# Altium PCB EasyRideOS_Altium_PCB.PcbDoc
Units mm, origin at the board's own origin, x right, y up, seen from the top; angles counter-clockwise.
Board outline 33 x 38 mm, 2 copper layers (Top Layer, Bottom Layer), stack 1.691 mm thick; 64 components, 34 nets, 158 pads, 75 vias.
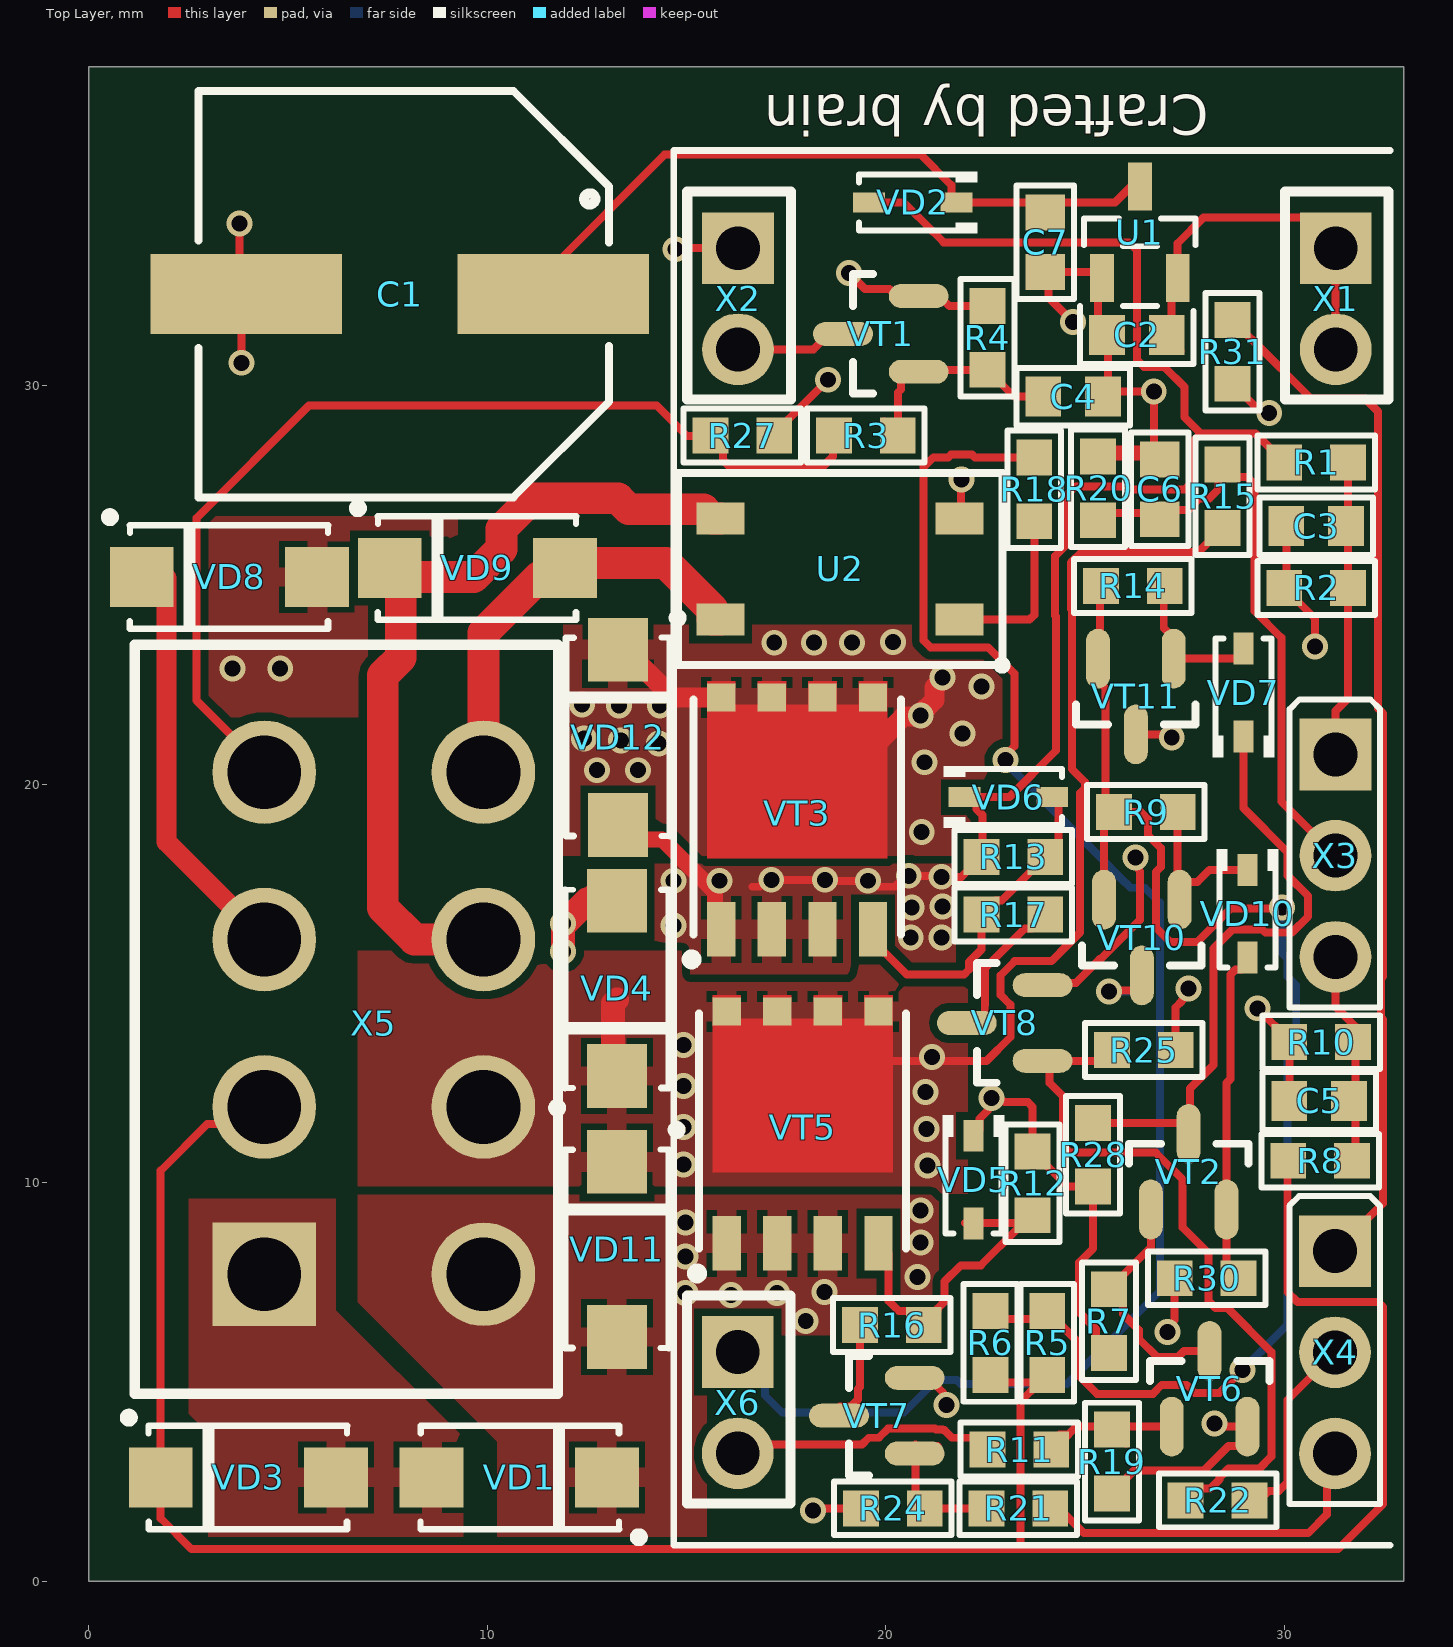
[diagram p0: Top Layer view]
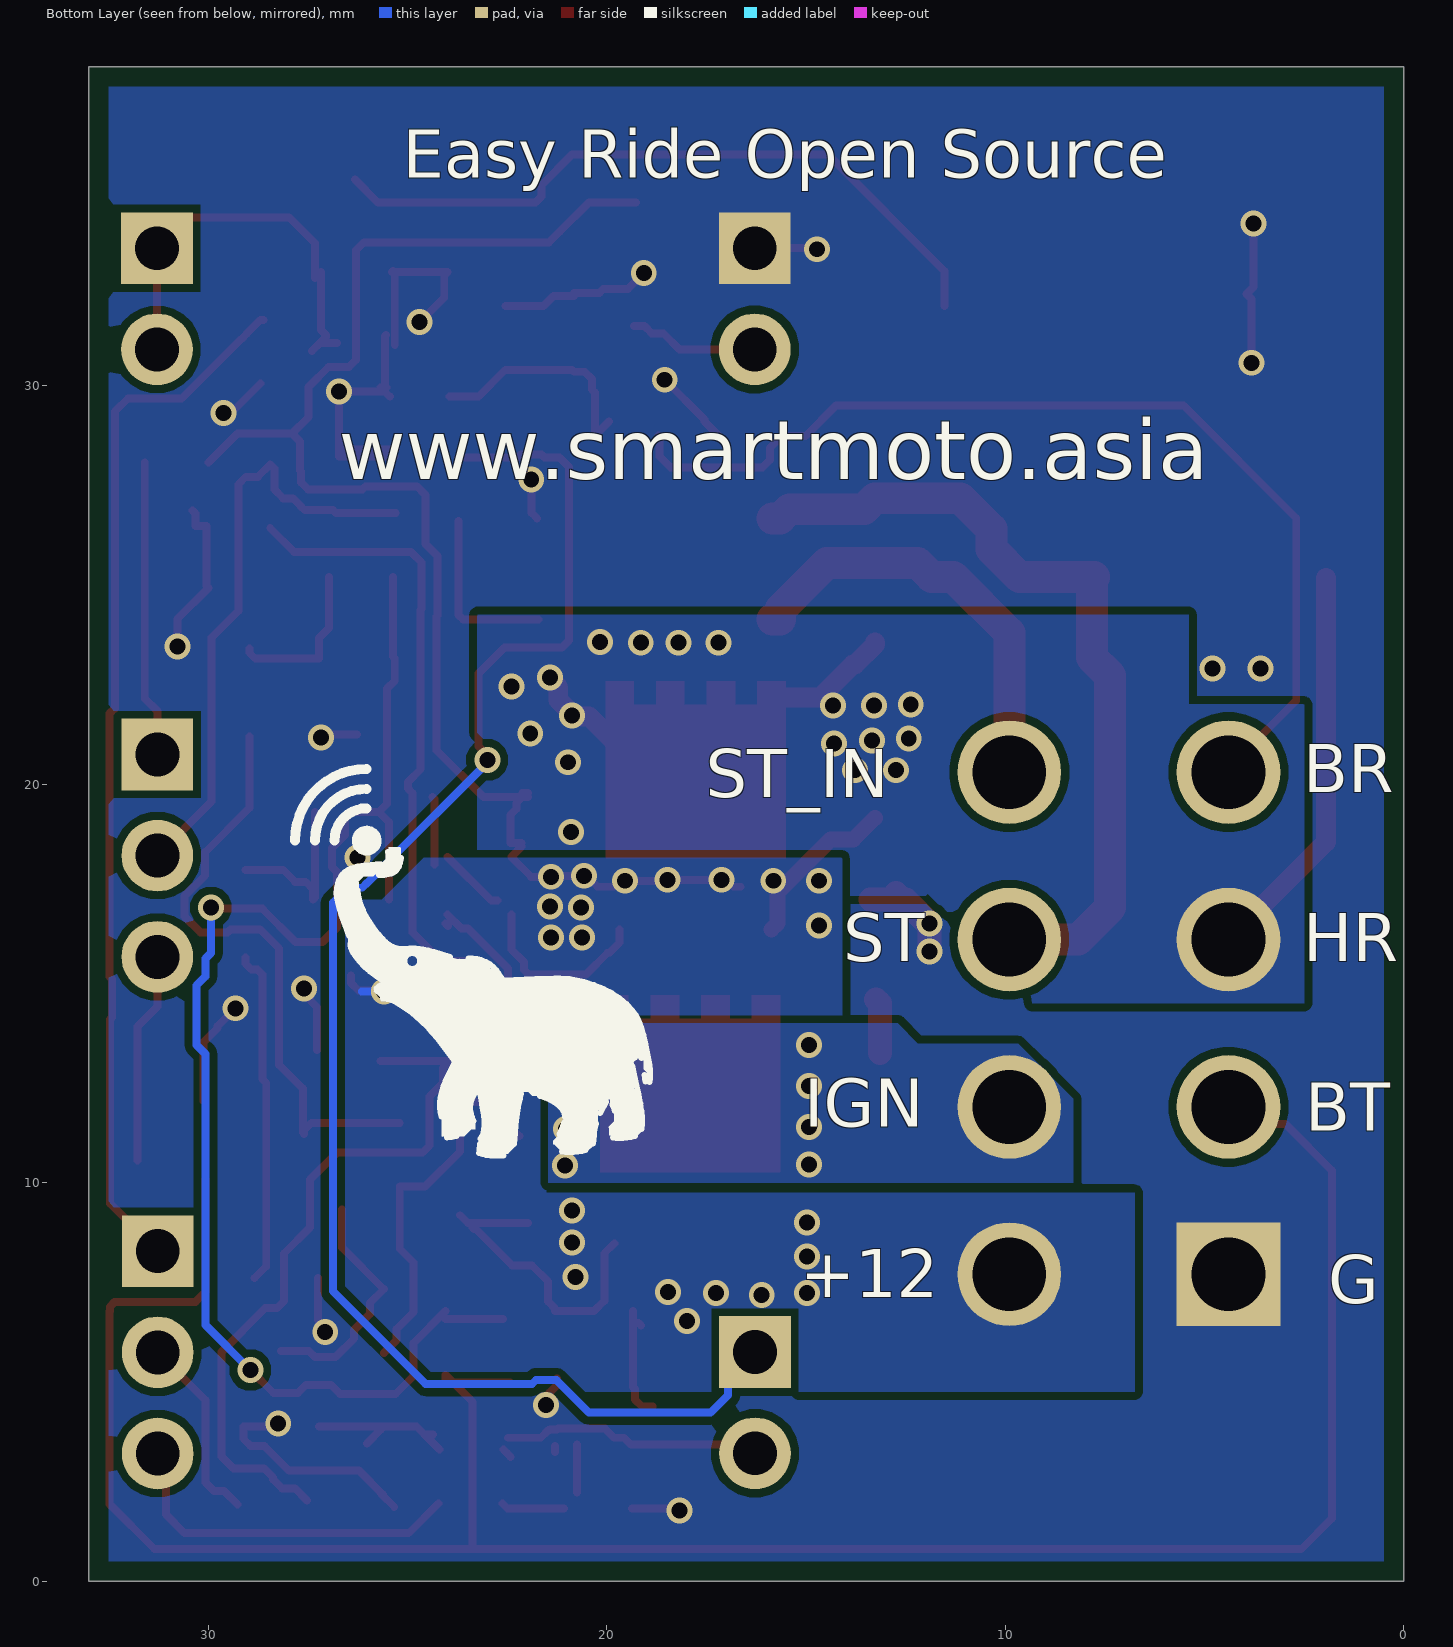
[diagram p1: Bottom Layer view, seen from below]
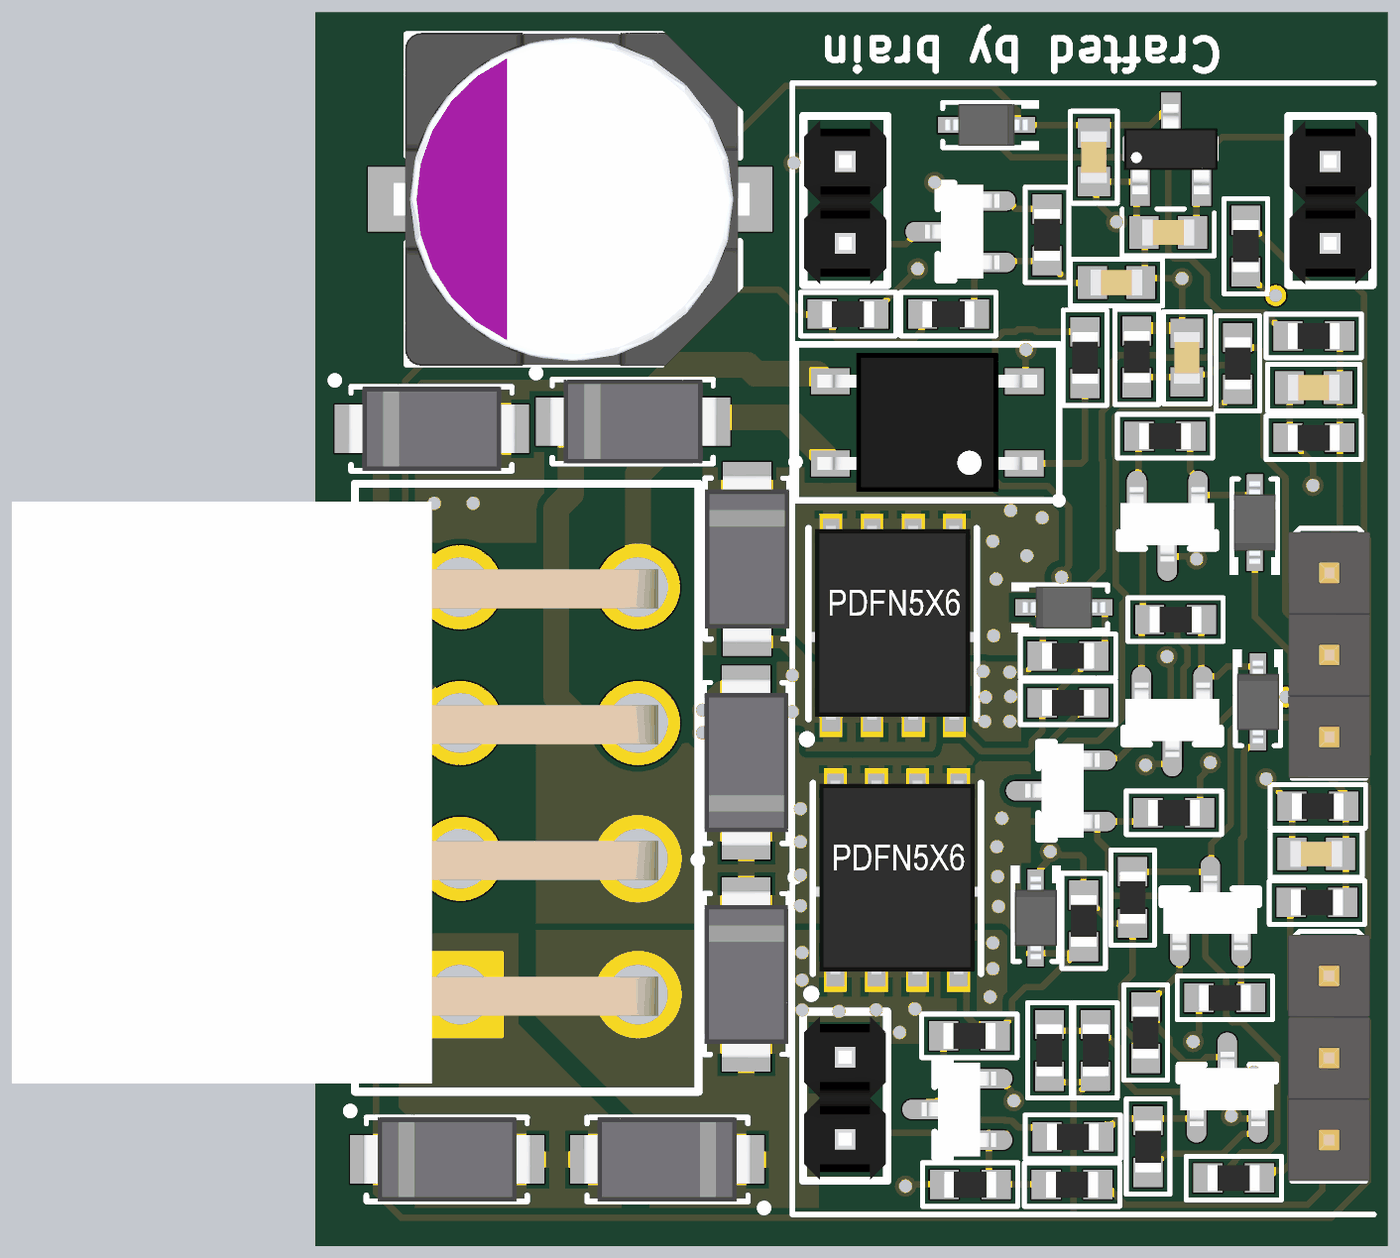
[diagram p2: 3D render of the assembled board from above, using the file's embedded part models]

## Layer stack, top to bottom
Top Solder: solder mask 0.0102, Solder Resist, Dk 3.5
Top Layer: signal copper 0.0356
Dielectric 1: dielectric 1.62, FR-4, Dk 4.8
Bottom Layer: signal copper 0.0356
Bottom Solder: solder mask 0.0102, Solder Resist, Dk 3.5

## Board outline
0,0 33,0 33,38 0,38

## Design rules (kind name [scope] priority, off if disabled: settings)
BoardOutlineClearance [All] p1: gap=0.254 ignorepadtopadclearanceinfootprint=FALSE except(0: Arc-SplitContinuation Track-SplitContinuation SMDPad-SplitContinuation THPad-SplitContinuation Via-SplitContinuation Fill-SplitContinuation Poly-SplitContinuation Region-SplitContinuation Text-SplitContinuation)
Clearance [All] p1: gap=0.2 ignorepadtopadclearanceinfootprint=FALSE
HoleToHoleClearance [All] p1: gap=0.2 allowstackedmicrovias=TRUE
MinimumSolderMaskSliver [All] p1: minsoldermaskwidth=0.1
PlaneConnect [All] p1: planeconnectstyle=Relief reliefexpansion=0.508 reliefentries=4 reliefconductorwidth=0.5 reliefairgap=0.15
PolygonConnect [All] p1: thpad.connectstyle=Direct thpad.reliefconductorwidth=0.254 thpad.reliefentries=4 thpad.polygonreliefangle="90 Angle" thpad.airgapwidth=0.254 smdpad.connectstyle=Relief smdpad.reliefconductorwidth=0.5 smdpad.reliefentries=4 smdpad.polygonreliefangle="90 Angle" smdpad.airgapwidth=0.15 via.connectstyle=Direct via.reliefconductorwidth=0.254 via.reliefentries=4 via.polygonreliefangle="90 Angle" via.airgapwidth=0.254
RoutingVias [All] p1: holewidth=0.4 width=0.65 viastyle="Through Hole" minholewidth=0.4 minwidth=0.65 maxholewidth=0.711 maxwidth=1.27
SilkToSilkClearance [All] p1: silktosilkclearance=0.15
SilkToSolderMaskClearance [IsPad] p1: minsilkscreentomaskgap=0.15 clearancetoexposedcopper=TRUE
SolderMaskExpansion [All] p1: expansion=0.05 istentingtop=FALSE
SupplyNets "Schematic Supply Nets" [InNet('GND')] p1: voltage=0.000
Width [All] p1: maxlimit=5 minlimit=0.2 preferedwidth=0.2 minimp=50.000000 maximp=50.000000 favimp=50.000000
25 further rules are at their usual default settings.

## Components (designator, comment, footprint, x,y, rotation, side; value= is the part's Value field where it differs from the comment)
C1 "220uF 63V" "SMD_AL_10x12.6_(Size code F12)" 7.85,32.3 r0 top value=220uF
C2 "0603 10uF 25V" CAP0603 26.3,31.275 r0 top value=10uF
C3 "0603 470pF 50V" CAP0603 30.8,26.475 r0 top value=470pF
C4 "0603 470pF 50V" CAP0603 24.7,29.725 r0 top value=470pF
C5 "0603 470pF 50V" CAP0603 30.875,12.05 r0 top value=470pF
C6 "0603 470pF 50V" CAP0603 26.875,27.4 r90 top value=470pF
C7 "0603 1uF 50V" CAP0603 24,33.6 r90 top value=1uF
R1 "0603 100k 1%" RES0603 30.8,28.075 r180 top value="100k 1%"
R2 "0603 20k 1%" RES0603 30.8,24.925 r0 top value="20k 1%"
R3 "0603 100k 1%" RES0603 19.5,28.75 r180 top value="100k 1%"
R4 "0603 20k 1%" RES0603 22.55,31.2 r270 top value="20k 1%"
R5 "0603 680 1%" RES0603 24.05,5.975 r90 top value="680 1%"
R6 "0603 680 1%" RES0603 22.625,5.975 r90 top value="680 1%"
R7 "0603 100k 1%" RES0603 25.6,6.525 r270 top value="100k 1%"
R8 "0603 100k 1%" RES0603 30.9,10.55 r180 top value="100k 1%"
R9 "0603 100k 1%" RES0603 26.525,19.3 r180 top value="100k 1%"
R10 "0603 20k 1%" RES0603 30.925,13.525 r0 top value="20k 1%"
R11 "0603 20k 1%" RES0603 23.35,3.3 r0 top value="20k 1%"
R12 "0603 10k 1%" RES0603 23.683,9.981 r90 top value="10k 1%"
R13 "0603 10k 1%" RES0603 23.2,18.175 r180 top value="10k 1%"
R14 "0603 100k 1%" RES0603 26.2,24.975 r180 top value="100k 1%"
R15 "0603 100k 1%" RES0603 28.45,27.225 r270 top value="100k 1%"
R16 "0603 4.7k 1%" RES0603 20.15,6.425 r0 top value="4.7k 1%"
R17 "0603 4.7k 1%" RES0603 23.2,16.725 r180 top value="4.7k 1%"
R18 "0603 240 1%" RES0603 23.725,27.4 r90 top value="240 1%"
R19 "0603 100k 1%" RES0603 25.675,3 r270 top value="100k 1%"
R20 "0603 20k 1%" RES0603 25.325,27.425 r270 top value="20k 1%"
R21 "0603 20k 1%" RES0603 23.325,1.825 r180 top value="20k 1%"
R22 "0603 20k 1%" RES0603 28.325,2.025 r180 top value="20k 1%"
R24 "0603 100k 1%" RES0603 20.175,1.825 r180 top value="100k 1%"
R25 "0603 100k 1%" RES0603 26.475,13.325 r0 top value="100k 1%"
R27 "0603 4.7k 1%" RES0603 16.4,28.75 r180 top value="4.7k 1%"
R28 "0603 4.7k 1%" RES0603 25.2,10.7 r270 top value="4.7k 1%"
R30 "0603 4.7k 1%" RES0603 28.05,7.6 r0 top value="4.7k 1%"
R31 "0603 680 1%" RES0603 28.7,30.85 r90 top value="680 1%"
U1 "SE8633" SOT-23-3 26.375,33.85 r0 top
U2 "GAQY212G1S" SOP-4 18.85,25.4 r180 top
VD1 "SMAJ30CA" "DO-214AC (SMA)" 10.8,2.6 r180 top value=30V
VD2 "1N5819WS" SOD-323 20.675,34.6 r180 top
VD3 "SMAJ30CA" "DO-214AC (SMA)" 4,2.6 r0 top value=30V
VD4 "SMAJ30CA" "DO-214AC (SMA)" 13.25,14.875 r90 top value=30V
VD5 "BZT52C15S-7-F" SOD-323 22.2,10.075 r270 top value=15V
VD6 "BZT52C15S-7-F" SOD-323 23.075,19.675 r0 top value=15V
VD7 "1N5819WS" SOD-323 28.975,22.3 r90 top
VD8 "SMAJ30CA" "DO-214AC (SMA)" 3.525,25.2 r0 top value=30V
VD9 "SMAJ30CA" "DO-214AC (SMA)" 9.75,25.425 r0 top value=30V
VD10 "1N5819WS" SOD-323 29.075,16.75 r270 top
VD11 "SMAJ24CA" "DO-214AC (SMA)" 13.25,8.325 r270 top value=24V
VD12 "SMAJ24CA" "DO-214AC (SMA)" 13.275,21.175 r270 top value=24V
VT1 "MMBT5551" SOT-23-3N 19.875,31.3 r180 top
VT2 "MMBT5551" SOT-23-3N 27.6,10.275 r90 top
VT3 "SP40P03NK" PPAK5*6-8L_(PDFN5*6) 17.775,19.125 r90 top
VT5 "SP40P03NK" PPAK5*6-8L_(PDFN5*6) 17.91,11.245 r90 top
VT6 "MMBT5551" SOT-23-3N 28.125,4.825 r90 top
VT7 "MMBT5551" SOT-23-3N 19.775,4.15 r180 top
VT8 "MMBT5551" SOT-23-3N 22.983,14.006 r180 top
VT10 "MMBT5551" SOT-23-3N 26.425,16.15 r270 top
VT11 "MMBT5401" SOT-23-3N 26.275,22.2 r270 top
X1 "PLS-2 (DS1021-1x2)" "PLS-2 (DS1021-1x2)" 31.283,32.206 r0 top
X2 "PLS-2 (DS1021-1x2)" "PLS-2 (DS1021-1x2)" 16.283,32.206 r0 top
X3 "PLS-3 (DS1021-1x3)" "PLS-3 (DS1021-1X3)" 31.283,18.206 r0 top
X4 "PLS-3 (DS1021-1x3)" "PLS-3 (DS1021-1X3)" 31.275,5.74 r0 top
X5 "DLL-5569-8AW" DLL-5569-8AW 7.05,14.1 r180 top
X6 "PLS-2 (DS1021-1x2)" "PLS-2 (DS1021-1x2)" 16.275,4.5 r0 top

## Footprints (in the part's own frame and the unit in brackets; to place one, negate y for a bottom-side part, rotate by r counter-clockwise, add the part's x,y. Pads: shape width x height; smd on the part's side, far side on the other; paste and mask are expansions set on the pad)
CAP0603 [mm] "Chip Capacitor, Body 1.6x0.8mm, IPC Low Density"
  rect 0.9x1 smd mask+0.05: 1(-0.75,0) 2(0.75,0)
  silkscreen extent -1.43,-0.72 1.43,0.72, body extent -0.8,-0.4 0.8,0.4, height 0.8
DLL-5569-8AW [mm]
  rect 2.6x2.6 hole 1.85: 1(2.65,6.4)
  round 2.6 hole 1.85: 2(2.65,2.2) 3(2.65,-2) 4(2.65,-6.2) 5(-2.85,6.4) 6(-2.85,2.2) 7(-2.85,-2) 8(-2.85,-6.2)
  silkscreen extent -4.72,-9.4 5.9,9.4, body extent -3.47,-8.85 16.53,9.15, height 11.9
"DO-214AC (SMA)" [mm]
  rect 1.6x1.5 smd mask+0.05: 1(-2.2,0) 2(2.2,0)
  silkscreen extent -3.1,-1.3 2.47,1.6, body extent -2.6,-1.3 2.6,1.3, height 2.4
"PLS-2 (DS1021-1x2)" [mm]
  rect 1.8x1.8 hole 1.1: 1(0.008,1.246)
  round 1.8 hole 1.1: 2(0.008,-1.294)
  silkscreen extent -1.27,-2.55 1.33,2.67, body extent -1.24,-2.54 1.3,2.54, height 7.81
"PLS-3 (DS1021-1X3)" [mm]
  rect 1.8x1.8 hole 1.1: 1(0,2.54)
  round 1.8 hole 1.1: 2(0,0) 3(0,-2.54)
  silkscreen extent -1.15,-3.81 1.12,3.92, body extent -1.27,-3.81 1.27,3.81, height 8.62
PPAK5*6-8L_(PDFN5*6) [mm]
  rect 1.372x0.71 smd paste-1000 mask+0: 1(-2.77,1.905) 2(-2.77,0.635) 3(-2.77,-0.635) 4(-2.77,-1.905)
  rect 0.71x0.71 smd paste-1000 mask+0: 5(3.048,-1.905) 6(3.048,-0.635) 7(3.048,0.635) 8(3.048,1.905)
  Top Layer region: -0.984,-2.26 3.456,-2.26 3.456,-1.55 2.866,-1.55 2.866,-0.99 3.456,-0.99 3.456,-0.28 2.866,-0.28 2.866,0.28 3.456,0.28 3.456,0.99 2.866,0.99 2.866,1.55 3.456,1.55 3.456,2.26 -0.984,2.26
  silkscreen extent -3.65,-2.6 3,2.77, body extent -2.92,-2.5 3.08,2.5, height 1.02
RES0603 [mm] "Chip Resistor, Body 16x08mm, IPC Low Density"
  rect 0.9x0.9 smd mask+0.05: 1(-0.8,0) 2(0.8,0)
  silkscreen extent -1.48,-0.67 1.48,0.67, body extent -0.8,-0.4 0.8,0.4, height 0.45
"SMD_AL_10x12.6_(Size code F12)" [mm] "Size code F12"
  rect 4.8x2 smd: 1(3.8,0) 2(-3.9,0)
  silkscreen extent -5.1,-5.1 5.2,5.1, body extent -5.5,-5.15 5.5,5.15, height 12.6
SOD-323 [mm]
  rect 0.8x0.5 smd mask+0.05: 1(-1.1,0) 2(1.1,0)
  silkscreen extent -1.62,-0.77 1.35,0.77, body extent -1.27,-0.65 1.27,0.65, height 1.14
SOP-4 [mm]
  rect 1.2x0.8 smd: 1(-3,1.27) 2(-3,-1.27) 3(3,-1.27) 4(3,1.27)
  silkscreen extent -4.18,-2.41 4.06,2.53, body extent -3.4,-2.15 3.4,2.15, height 2.1
SOT-23-3 [mm] "TI - DCU 0.5 mm"
  rect 0.6x1.2 smd mask+0.05: 1(-0.95,-1.15) 2(0.95,-1.15) 3(0,1.15)
  silkscreen extent -1.4,-0.35 1.4,0.35, body extent -1.45,-1.4 1.45,1.4, height 1.3
SOT-23-3N [mm]
  oval 1.5x0.6 smd mask+0.05: 1(-0.95,0.95) 2(-0.95,-0.95) 3(0.95,0)
  silkscreen extent 0.2,-1.5 0.7,1.5, body extent -1.2,-1.45 1.1,1.45, height 1

## Part data
C1: library part "SMD AL 330uF 50V 10x12.6_1", "-55℃~+105℃ 10.2mm 10mm 2000hrs@105℃ 292mA@120Hz 330uF 50V ±20% SMD,D10xL10.2mm Aluminum Electrolytic Capacitors - SMD ROHS", Case/Package=10x10.6мм, Max Operating Temperature=105°C, Min Operating Temperature=-55°C, Part Number=189RV0038, Tolerance=20%, Voltage Rating=63V, ComponentLink1Description=Information, ComponentLink1URL=https://industrial.panasonic.com/ww/products/pt/os-con/models/50SVPF68M, ComponentLink2Description=Datasheet, ComponentLink2URL=https://industrial.panasonic.com/cdbs/www-data/pdf/AAB8000/AAB8000C177.pdf, Mounting Technology=SMT
C2: library part "0603 4.7uF 25V", "10uF, 25V, ±10%, X5R, 0603", Capacitor Type=Ceramic, Case/Package=0603, Max Operating Temperature=85°C, Min Operating Temperature=-55°C, Part Number=CL10A106MA8NRNC, Tolerance=10%, Voltage Rating=25V, Mounting Technology=SMD, RoHS Compliant=Yes
C3 C4 C5 C6: library part "0603 390pF 50V", "470pF, 50V, ±5%, X7R, 0603", Capacitor Type=Ceramic, Case/Package=0603, Dielectric=X7R, Max Operating Temperature=125°C, Min Operating Temperature=-55°C, Part Number=0603B471K500NT, Tolerance=5%, Voltage Rating=50V, Component Type=Standard, ComponentLink2Description=Information, ComponentLink2URL=https://www.elitan.ru/price/item418250, Mounting Technology=SMD, RoHS Compliant=Yes
C7: library part "0603 0.1uF 50V", "1uF, 50V, ±10%, X7R, 0603", Capacitor Type=Ceramic, Case/Package=0603, Dielectric=X7R, Manufacturer=Murata, Max Operating Temperature=125°C, Min Operating Temperature=-55°C, Part Number=CL10A105KB8NNNC, Tolerance=10%, Voltage Rating=50V, Component Type=Standard, ComponentLink2Description=Information, ComponentLink2URL=https://www.elitan.ru/price/item8634398, Mounting Technology=SMD, Pins=2, RoHS Compliant=Yes
R1 R3 R7 R8 R9 R14 R15 R19 R24 R25: "0.1W, 75V, 100ppm/Cel, 1%", Part Number=0603WAF1003T5E, Tolerance=1%, Voltage Rating=50V, ComponentLink1Description=Information, ComponentLink1URL=https://www.elitan.ru/price/item1190578
R2 R4 R10 R11 R20 R21 R22: "0.1W, 75V, 100ppm/Cel, 1%", Max Operating Temperature=155°C, Min Operating Temperature=-55°C, Part Number=0603WAF2002T5E, Tolerance=1%, Voltage Rating=50V, Designators="0603 20k 1%"
R5 R6: library part "0603 4.7k 1%", "0.1W, 75V, 100ppm/Cel, 1%", Case/Package=0603, Max Operating Temperature=155°C, Min Operating Temperature=-55°C, Part Number=0603WAF6800T5E, Tolerance=1%, Voltage Rating=50V, ComponentLink1Description=Information, ComponentLink1URL=https://www.elitan.ru/price/item1613361, RoHS Compliant=Yes
R12 R13: library part "0603 100k 1%", "0.1W, 75V, 100ppm/Cel, 1%", Part Number=0603WAF1002T5E, Tolerance=1%, Voltage Rating=50V, ComponentLink1Description=Information, ComponentLink1URL=https://www.elitan.ru/price/item1190578
R16 R17: library part "0603 10k 1%", "0.1W, 75V, 100ppm/Cel, 1%", Max Operating Temperature=155°C, Min Operating Temperature=-55°C, Part Number=0603WAF4701T5E, Tolerance=1%, Voltage Rating=50V, ComponentLink1Description=Information, ComponentLink1URL=https://www.elitan.ru/price/item1612641, ComponentLink2Description=Datasheet, ComponentLink2URL=https://ru.mouser.com/datasheet/2/54/crxxxxx-1858361.pdf, RoHS Compliant=Yes
R18: library part "0603 4.7k 1%", "0.1W, 75V, 100ppm/Cel, 1%", Case/Package=0603, Max Operating Temperature=155°C, Min Operating Temperature=-55°C, Part Number=0603WAF2400T5E, Tolerance=1%, Voltage Rating=50V, ComponentLink1Description=Information, ComponentLink1URL=https://www.elitan.ru/price/item1613361, RoHS Compliant=Yes
R27 R28 R30: "0.1W, 75V, 100ppm/Cel, 1%", Case/Package=0603, Max Operating Temperature=155°C, Min Operating Temperature=-55°C, Part Number=0603WAF4701T5E, Tolerance=1%, Voltage Rating=50V, ComponentLink1Description=Information, ComponentLink1URL=https://www.elitan.ru/price/item1613361, RoHS Compliant=Yes
R31: library part "0603 100k 1%", "0.1W, 75V, 100ppm/Cel, 1%", Part Number=0603WAF6800T5E, Tolerance=1%, Voltage Rating=50V, ComponentLink1Description=Information, ComponentLink1URL=https://www.elitan.ru/price/item1190578
U1: "LDO, 200mA, 60V, 0.3V Dropout, SOT23-3", Part Number=SE8633X2-HF
U2: "-40℃~+85℃ 1.2V 1.3A 1.5kV 130mΩ 1ms 450mW 50mA 600us 60V AC,DC One set normally open: 2A (SPST - normally open) SOP-4 Solid State Relays (MOS Output) ROHS", Part Number=GAQY212G1S
VD1 VD3 VD4 VD8 VD9: "TVS Diode, 400W, 30V V(RWM), Bidirectional, 1 Element, Silicon, DO-214AC", Part Number=SMAJ30CA
VD2 VD7 VD10: library part 1N4148WS, "Rectifier Diode, 1 Phase, 1 Element, 0.15A, 75V V(RRM), Silicon, SOD-323", Part Number=1N5819WS
VD5 VD6: "15V 200mW SOD-323", ComponentLink1Description=Datasheet, ComponentLink1URL=https://www.vishay.com/docs/85760/bzt52.pdf, Part Number=BZT52C15S-7-F
VD11 VD12: library part SMAJ30CA, "TVS Diode, 400W, 30V V(RWM), Bidirectional, 1 Element, Silicon, DO-214AC", Part Number=SMAJ24CA
VT1 VT2 VT6 VT7 VT8 VT10: library part BC817-25, "NPN 0.5A 45V", Part Number=MMBT5551
VT3 VT5: "P-Channel 100A 60V 3 mOhm PDFN5x6", Part Number=SP40P03NK
VT11: library part BC807-40, "PNP 0.5A 45V", Part Number=MMBT5401
X1 X2 X6: "Single Row Pin Header pitch 2.54mm, male", Part Number=DS1021-1x2SF11-B
X3 X4: "Single Row Pin Header pitch 2.54mm, male", Part Number=DS1021-1x3SF11-B
X5: "-35℃~+105℃ 16P 2 2x4P 300V 4.2mm 5.5mm 8 9A Brass Mini-Fit(MX 4.2) PA66 Right Angle Tin Transparent UL94V-0 Push-Pull,P=4.2mm Wire To Board Connector ROHS", Case/Package=Mini-Fit, Max Current Rating=9A, ComponentLink1Description=Information, ComponentLink1URL=https://iarduino.ru/shop/radioparts/kontaktnye-kolodki-arduino.html, Mounting Technology=Hole, Part Number=DLL-5569-8AW, Pins=8

## Via types
v1: diameter 0.65, hole 0.4, Top Layer to Bottom Layer, tented both sides, 73 vias
v2: diameter 0.65, hole 0.4, Top Layer to Bottom Layer, 2 vias

## Nets (pads, with @x,y where several pads share a name; then routed paths per layer and width w, separated by ;. In a path a pad name is that pad's centre, name@x,y a point inside that pad or via, vN(x,y) a via of type N, cw(c..) or ccw(c..) an arc to the next point about the centre after c; other vN are vias at no path point)
+3.3V: C2.2 U1.2 X1.1 X1.2 | length 11
  Top Layer w0.2: C2.2@26.775,31.075 C2.2@27.2,31.075 ; U1.2@27.175,32.85 27.175,31.4 C2.2 27.05,31.225 C2.2@27.2,31.075 ; U1.2 27.325,33.575 27.975,34.225 28.625,34.225 30.517,34.225 X1.1 X1.2 X1.2@30.858,30.912 ; C2.2@27.4,30.875 C2.2@27.2,31.075
+12V: R1.2 R7.2 R12.2 R13.2 R28.2 VD1.1 VD2.2 VD5.1 VD6.1 VD11.2 VD12.2 VT3.1 VT3.2 VT3.3 VT5.1 VT5.2 VT5.3 VT10.3 X5.5 | length 53.5
  Top Layer w0.2: 16.65,17.425 16.828,17.425 17.003,17.6 v1(18.475,17.6) 18.5,17.575 19.672,17.575 19.822,17.425 20.233,17.425 20.508,17.7 v1@21.317,17.7 ; VD2.2@19.275,34.6 VD2.2 20.451,34.6 21.175,33.876 21.451,33.6 24.399,33.6 26.1,33.6 26.3,33.4 26.3,30.651 26.476,30.475 26.984,30.475 27.492,29.967 27.492,29.208 27.901,28.8 ; v1(21.4,17.675) 21.9,17.675 R13.2 R13.2@22.142,18.433 ; VD6.1 VD6.1@22.125,19.675 ; VD6.1@21.975,19.775 VD6.1@22.125,19.775 ; R13.2@22.142,18.525 22.425,18.525 22.425,19.225 22.275,19.375 22.275,19.525 VD6.1@22.125,19.675 ; VD5.1 22.35,11.325 22.35,11.602 22.564,11.816 22.564,12.039 v1@22.706,12.181 ; v1(22.65,12.125) 22.736,12.039 22.97,12.039 22.992,12.017 23.566,12.017 23.683,11.9 R12.2 24.564,9.9 R28.2 25.2,8.341 24.85,7.991 24.85,6.751 25.276,6.325 25.276,6.049 R7.2 ; v1(25.6,14.8) 25.625,14.825 26.24,14.825 26.425,15.01 VT10.3 ; R1.2 29.275,28.8 28.65,28.8 27.901,28.8 ; VD6.1@22.125,19.675 23.101,19.675 24.275,20.849 24.275,24.21 24.25,24.235 24.25,25.726 24.55,26.026 24.55,27.257 24.768,27.475 26.065,27.475 26.14,27.4 27.499,27.4 27.675,27.576 27.675,27.85 27.7,27.875 27.7,28.599 27.901,28.8
  Top Layer w0.4: VD12.2@13.275,19.15 13.812,18.613 14.387,18.613 15.715,17.285 15.715,16.51 VT3.1
  Bottom Layer w0.2: v1(25.6,14.8) 26.15,14.8
  other v1: 17.99,6.531 16.115,7.181 14.975,7.225 17.265,7.231 18.465,7.256 20.79,7.631 14.975,8.15 20.875,8.5 14.975,9 20.875,9.3 20.625,16.15 21.4,16.15 14.675,16.45 20.65,16.9 21.425,16.925 14.675,17.575 15.825,17.575 19.55,17.575 17.125,17.6 20.575,17.7
BRAKE: R3.2 R27.2 X5.4 | length 25.6
  Top Layer w0.2: X5.4 4.4,20.397 2.7,22.097 2.7,26.675 5.525,29.5 14.25,29.5 15.017,28.733 15.442,28.733 R27.2@15.512,28.663 ; R27.2 15.912,28.438 15.912,28.138 16.1,27.95 18.4,27.95 18.675,28.225 18.675,28.725 R3.2
BRAKE_MCU: VT1.3 X2.2 | length 3.3
  Top Layer w0.2: X2.2 18.181,30.912 18.584,31.315 18.876,31.315 19.061,31.5 VT1.3@19.325,31.5
BUTTON: R5.1 R6.1 R8.2 VD3.1 X5.2 | length 60.3
  Top Layer w0.2: X5.2 3.969,11.469 2.969,11.469 1.8,10.3 VD3.1 1.8,1.575 2.575,0.8 23.375,0.8 ; R6.1@22.431,4.981 R5.1@23.856,4.981 ; 30.075,10.084 30.075,7.256 30.331,7 32.358,7 32.475,6.883 32.475,6.778 32.483,6.77 32.483,1.933 31.35,0.8 23.375,0.8 ; 23.375,0.8 23.375,4.5 R5.1@23.856,4.981 ; R5.1@23.856,4.981 R5.1 24.05,4.981 R5.1@23.856,4.981
BUTTON_MCU: C5.2 R8.1 R10.2 X3.3 | length 5.3
  Top Layer w0.2: X3.3 31.283,14.417 31.783,13.917 31.783,13.006 R8.1@31.783,10.55
ENABLE_BUTTON_MCU: R11.1 X6.2 | length 6.8
  Top Layer w0.2: X6.2 16.502,3.425 19.4,3.425 19.571,3.596 19.823,3.596 20.051,3.825 21.233,3.825 21.258,3.8 21.424,3.8 21.431,3.793 21.467,3.793 21.664,3.596 R11.1@22.484,3.596 ; R11.1@22.417,3.117 22.509,3.209 R11.1@22.6,3.3
EXT_IGN_MCU: C6.1 R15.1 R20.2 X3.2 | length 15.1
  Top Layer w0.2: R20.2@25.3,26.8 26.8,26.8 26.875,26.875 27.583,26.875 27.7,26.992 27.7,26.999 27.876,27.175 28.125,27.175 28.342,27.392 28.342,27.917 R15.1 28.762,27.713 29.062,27.713 29.25,27.525 29.25,24.351 29.925,23.676 29.925,19.564 X3.2
GND: C1.2 C2.1 C3.1 C4.2 C5.1 C6.2 C7.1 R2.1 R4.1 R10.1 R19.2 R20.1 R24.2 R25.2 R27.1 R30.1 R31.1 U1.1 U2.2 VD1.2 VD3.2 VD4.2 VD8.2 VT1.2 VT6.2 VT7.2 VT8.2 VT11.3 X2.1 X5.1 | length 52.4
  Top Layer w0.2: v1(3.775,34.075) 3.775,32.475 C1.2 3.825,32.175 v1(3.825,30.575) ; v1(14.725,33.425) 14.752,33.452 X2.1 ; R27.1 17.55,29.1 17.55,29.15 v1(18.55,30.15) ; v1(18.175,1.775) 18.225,1.825 R24.2 ; v1(19.075,32.825) 19.476,32.424 20.093,32.424 20.19,32.327 VT1.2@20.825,32.327 ; VT1.2 21.342,32.25 21.592,32 R4.1 ; VT7.2@21.252,5.084 21.252,4.915 21.439,4.728 21.439,4.503 v1(21.525,4.417) ; U2.2@21.75,26.67 21.89,26.81 21.89,27.64 v1(21.9,27.65) ; VT8.2 23.992,15.014 24.773,15.014 25.368,15.61 25.392,15.61 26.375,16.593 26.375,17.813 26.348,17.84 26.348,18.069 v1(26.262,18.155) ; v1(24.7,31.6) 24.083,32.217 24.083,32.767 C7.1 U1.1@25.35,32.85 ; R20.1@25.3,28.4 C6.2@26.725,28.4 ; R20.1 26.725,28.225 C6.2@26.725,28.4 ; C2.1@25.325,31.025 25.325,32.825 U1.1@25.35,32.85 ; R19.2@25.338,1.863 R19.2 ; U1.1@25.375,32.875 U1.1@25.35,32.85 ; U1.1@25.4,32.85 U1.1@25.35,32.85 ; C4.2 25.681,29.956 C4.2@25.533,29.956 ; C2.1 25.572,31.253 25.572,29.85 v1(26.725,29.85) C6.2@26.725,28.4 ; R19.2@25.625,2.175 26.225,2.775 27.985,2.775 28.598,3.388 28.94,3.388 29.125,3.573 29.125,3.875 VT6.2 28.325,3.875 v1(28.25,3.95) ; VT11.3 27.1,21.25 v1(27.175,21.175) ; v1(27.071,6.246) 27.071,6.367 27.25,6.547 R30.1 ; R25.2 27.275,14.4 27.433,14.558 27.433,14.586 27.6,14.753 v1(27.6,14.875) ; R31.1 29.443,29.307 29.609,29.307 v2(29.622,29.32) ; v1(29.325,14.375) 29.775,13.925 29.775,13.875 R10.1 ; C5.1 R10.1@30.125,13.5 ; C3.1@30.4,26.866 30.325,26.791 30.325,26.475 C3.1 30.05,24.975 R2.1 30.775,24.15 v1(30.775,23.45)
  Top Layer w0.6: v1(11.9,15.8) 11.9,16.486 11.923,16.51 11.985,16.51 VD4.2@12.74,17.265 ; v1(11.9,16.5) 11.9,16.514 11.925,16.539 11.925,16.544 12.49,17.11 VD4.2@13.39,17.11
  other v1: 3.6,22.9 4.8,22.9
HORN: VD8.1 VD12.1 VT3.5 VT3.6 VT3.7 VT3.8 X5.3 | length 18.4
  Top Layer w0.5: VD8.1@1.95,25.175 1.95,18.55 X5.3 X5.3@4.4,15.532 ; VD12.1@13.275,23.55 13.275,23.5 13.775,23 13.825,23 14.652,22.173 VT3.8 ; 17.8,21.125 19.875,21.125 20.446,21.696 20.846,21.696 v1(20.875,21.725) 20.875,21.766 21.221,22.112 21.221,22.431 21.425,22.634 v1(21.425,22.675)
  other v1: 20.9,18.8 12.75,20.35 13.775,20.35 20.975,20.55 14.3,21.025 13.35,21.1 12.425,21.15 21.925,21.275 13.3,21.975 14.325,21.975 12.375,22 22.4,22.45 17.2,23.55 18.2,23.55 19.15,23.55 20.178,23.564
HORN_MCU: R22.1 X4.2 | length 4.8
  Top Layer w0.2: R22.1@29.275,1.925 29.612,2.262 29.862,2.262 30.075,2.475 30.075,4.54 X4.2
IGN: R15.2 VD4.1 VD11.1 VT5.5 VT5.6 VT5.7 VT5.8 X5.6 | length 22.9
  Top Layer w0.2: 19.563,13.05 21.176,13.05 22.525,13.05 23.125,13.65 23.125,14.465 22.883,14.707 22.883,14.952 22.883,15.204 23.234,15.556 24.155,15.556 24.574,15.975 24.875,16.276 24.875,19.774 24.993,19.892 24.993,20.057 24.675,20.375 24.675,24.376 24.65,24.401 24.65,25.56 24.915,25.825 27.85,25.825 R15.2
  Top Layer w0.6: VD4.1@13.15,13.25 13.151,13.251 13.151,14.501 13.25,14.6
  other v1: 21.05,10.425 14.925,10.45 21.025,11.35 14.925,11.4 21,12.275 14.925,12.425 21.154,13.154 14.925,13.45
IGN_MCU: R21.1 X4.3 | length 9
  Top Layer w0.2: R21.1@24.225,1.95 24.975,1.2 30.6,1.2 31.067,1.667 31.067,2.99 X4.3@31.283,3.206
NetC1_1: C1.1 C7.2 U1.3 VD2.1 | length 17.8
  Top Layer w0.2: C1.1@11.525,32 11.525,32.875 14.45,35.8 20.875,35.8 21.642,35.033 21.642,34.75 21.792,34.6 23.775,34.6 25.75,34.6 U1.3@26.325,35.175
NetC4_1: C4.1 R3.1 R4.2 VT1.1 | length 5.9
  Top Layer w0.2: R3.1@19.95,29.1 R3.1 20.3,29.825 20.376,29.901 20.376,30.165 20.561,30.35 VT1.1 20.875,30.4 R4.2 23.225,29.725 C4.1
NetR5_2: R5.2 R6.2 R9.2 R14.2 VT10.2 VT11.2 | length 36.3
  Top Layer w0.2: R6.2@22.608,6.581 R5.2@24.05,6.581 ; R5.2 24.85,5.975 24.85,5.151 25.301,4.7 26.702,4.7 26.926,4.925 27.55,4.925 27.75,4.725 28.374,4.725 28.947,5.298 v1(28.95,5.298) ; R14.2@25.375,25.2 25.375,23.2 VT11.2 25.325,22.592 25.517,22.4 25.517,19.508 R9.2 ; VT10.2 25.475,19.05 R9.2 ; v2(29.94,16.904) 29.911,16.875 28.65,16.875 27.814,16.039 27.138,16.039 26.775,16.401 26.775,17.799 26.9,17.924 26.9,18.401 26.575,18.726 26.575,19.125 26.4,19.3 R9.2
  Bottom Layer w0.2: v1(28.95,5.298) 30.075,6.424 30.075,13.225 30.3,13.45 30.3,14.952 30.075,15.177 30.075,15.625 29.94,15.76 v2(29.94,16.904)
NetR7_1: R7.1 VT2.1 VT6.3 | length 6.1
  Top Layer w0.2: VT2.1 26.65,8.375 R7.1 25.95,6.975 25.95,6.699 26.35,6.299 26.35,6.082 26.812,5.621 27.329,5.621 27.484,5.775 VT6.3@28.175,5.775
NetR9_1: R9.1 VD10.1 VT10.1 | length 4.4
  Top Layer w0.2: R9.1 27.325,17.15 VT10.1 27.375,17.364 27.56,17.549 27.824,17.549 28.125,17.85 VD10.1
NetR11_2: R11.2 R19.1 VT6.1 | length 4.1
  Top Layer w0.2: R11.2@24.2,3.3 24.388,3.488 R11.2@24.431,3.531 ; R11.2@24.363,3.675 R11.2@24.55,3.675 ; R11.2@24.55,3.65 R11.2@24.431,3.531 ; R19.1 R19.1@26.025,3.45 ; VT6.1@27.225,3.875 VT6.1 25.675,3.875 24.775,3.875 R11.2@24.431,3.531
NetR12_1: R12.1 R16.2 VD5.2 VT5.4 | length 8.1
  Top Layer w0.2: VT5.4 20.065,8.225 20.065,7.034 20.324,6.775 21.3,6.775 21.3,6.842 21.475,7.017 21.475,7.515 21.885,7.925 22.383,7.925 23.289,8.831 23.333,8.831 23.372,8.87 R12.1@23.372,8.981 ; VD5.2@21.983,8.981 R12.1@23.372,8.981 ; R12.1 23.483,8.981 R12.1@23.372,8.981
NetR13_1: R13.1 R17.2 VD6.2 VT3.4 | length 8.1
  Top Layer w0.2: VT3.4 19.68,16.024 19.935,15.769 19.981,15.769 20.525,15.225 21.966,15.225 22.083,15.342 22.083,15.536 22.4,15.853 R17.2 ; R17.2@22.75,17.075 22.9,17.075 R13.1 ; R13.1@24.333,17.981 24.333,19.631 VD6.2@24.383,19.681
NetR14_1: R14.1 VD7.2 VT11.1 | length 4.1
  Top Layer w0.2: R14.1@26.975,25.2 26.975,23.917 27.225,23.667 VT11.1 28.825,23.15 28.975,23.3 VD7.2
NetR16_1: R16.1 VT7.3 | length 2.8
  Top Layer w0.2: VT7.3@18.85,4.375 19.114,4.375 19.299,4.56 19.299,4.824 19.35,4.875 R16.1@19.35,6.775 ; R16.1@19.142,6.419 R16.1@19.202,6.479
NetR17_1: R17.1 VT8.3 | length 3.9
  Top Layer w0.2: VT8.3 22.297,14.006 22.482,14.191 22.482,14.455 ; 22.483,14.456 22.483,15.117 22.483,15.37 23.488,16.375 23.65,16.375 R17.1 ; R17.1@23.989,16.439 R17.1@24.05,16.5
NetR18_1: R18.1 U2.1 | length 4.4
  Top Layer w0.2: U2.1@21.715,24.13 23.608,24.13 23.725,24.247 R18.1
NetR21_2: R21.2 R24.1 VT7.1 | length 3
  Top Layer w0.2: R24.1@20.75,2.225 VT7.1@20.75,3.425 ; R24.1@21.075,1.825 22.5,1.825 R21.2@22.625,1.95 ; VT7.1@21.302,3.235 VT7.1@21.302,3.393
NetR22_2: R22.2 R25.1 VT8.1 | length 18.1
  Top Layer w0.2: R25.1@25.683,13.056 VT8.1 24.111,12.878 24.111,12.498 24.45,12.159 24.45,10.926 24.626,10.75 26.776,10.75 27.45,10.076 27.45,8.875 28.1,8.225 28.1,7.026 28.276,6.85 28.575,6.85 29.675,5.75 29.675,3.125 29.375,2.825 28.601,2.825 28.375,2.599 28.375,2.55 28.15,2.325 27.825,2.325 R22.2
NetR28_1: R28.1 VD7.1 VT2.3 | length 15.4
  Top Layer w0.2: R28.1 27.415,11.5 27.6,11.315 VT2.3 27.633,11.258 27.633,12.359 28.225,12.951 28.225,15.874 28.701,16.35 29.449,16.35 29.524,16.275 30.195,16.275 30.6,16.68 30.6,17.192 30.083,17.709 30.083,18.292 28.975,19.4 VD7.1
NetR30_2: R30.2 VD10.2 VT2.2 | length 8.5
  Top Layer w0.2: R30.2 28.55,7.9 28.55,12.5 28.65,12.6 28.65,15.225 28.775,15.35 28.925,15.35 29.075,15.5 VD10.2
STARTER: U2.3 VD9.1 X5.7 | length 20.8
  Top Layer w0.8: X5.7 8.175,16.1 7.375,16.9 7.375,22.725 7.825,23.175 7.825,25.15 7.775,25.2 9.65,25.2 10.35,25.9 10.35,26.4 11.125,27.175 13.275,27.175 13.55,26.9 15.42,26.9 15.65,26.67 U2.3
STARTER_IN: U2.4 VD9.2 X5.8 | length 10.9
  Top Layer w0.8: X5.8 9.9,23.8 11.3,25.2 11.85,25.2 12.2,25.55 14.481,25.55 15.65,24.381 15.65,24.13 U2.4
STARTER_MCU: R18.2 X6.1 | length 40.1
  Top Layer w0.2: v1(23,20.609) 23,20.726 23.225,20.951 23.225,22.775 22.57,23.43 21.126,23.43 20.95,23.606 20.95,27.958 21.192,28.2 21.566,28.2 21.641,28.275 22.159,28.275 22.234,28.2 R18.2
  Bottom Layer w0.2: X6.1 16.962,5.067 16.962,4.663 17.4,4.225 20.449,4.225 21.266,5.042 21.784,5.042 21.876,4.95 24.55,4.95 26.875,7.275 26.875,17.025 26.5,17.4 26.142,17.4 26.012,17.53 26.003,17.53 25.637,17.896 25.637,17.905 23,20.542 v1(23,20.609)
VERSION: R31.2 X4.1 | length 26.3
  Top Layer w0.2: R31.2@28.625,31.65 R31.2 29.05,31.3 29.05,31.292 29.167,31.175 29.175,31.175 30.675,29.675 32.025,29.675 32.35,29.35 32.35,21.903 32.483,21.77 32.483,15.169 32.425,15.111 32.425,14.149 32.475,14.099 32.475,9.48 X4.1
VIN_MCU: C3.2 R1.1 R2.2 X3.1 | length 7.5
  Top Layer w0.2: X3.1 31.283,21.833 31.6,22.15 R2.2 31.6,26.475 R1.1

## Polygon pours and split planes (outlines as drawn)
GND on Bottom Layer "GND_L02_P032" (solid, pour order 32): 0.5,37.5 32.5,37.5 32.5,0.5 0.5,0.5
+12V on Bottom Layer "+12V_L02_P031" (solid, pour order 31): 6.75,9.75 26.9,9.75 26.9,7.7 23.95,4.75 6.75,4.75
+12V on Bottom Layer "+12V_L02_P037" (solid, pour order 37): 24.6,18.15 25.65,17.1 26.3,17.1 26.7,16.7 26.7,14.4 26.9,14.2 26.9,8.25 21.525,8.25 21.525,14.15 14.1,14.15 14.1,18.15
HORN on Bottom Layer "HORN_L02_P039" (solid, pour order 39): 11.95,17.25 12,17.2 14,17.2 14,18.05 14.1,18.2 23.25,18.2 23.25,24.25 5.4,24.25 5.4,22 2.5,22 2.5,14.5 11,14.5 11,16.3
IGN on Bottom Layer "IGN_L02_P029" (solid, pour order 29): 21.475,14 12.7,14 12.2,13.483 9.683,13.483 8.3,12.1 8.3,10 21.475,10
IGN on Top Layer "IGN_L01_P034" (solid, pour order 34): 6.75,9.725 22.05,9.725 22.05,15.825 6.75,15.825
HORN on Top Layer "HORN_L01_P038" (solid, pour order 38): 11.9,24 23.9,24 23.9,18.275 23.975,18.2 11.9,18.2
+12V on Top Layer "+12V_L01_P035" (solid, pour order 35): 14.175,18 14.175,14.95 18.088,14.95 21.75,14.95 21.75,18
+12V on Top Layer "+12V_L01_P033" (solid, pour order 33): 6.75,7 10.25,3.5 10.25,1.075 15.5,1.075 15.5,6.175 21.325,6.175 21.325,9.7 6.75,9.7
GND on Top Layer "GND_L01_P030" (solid, pour order 30): 2.5,9.6 2.5,4.2 3,3.7 3,0.875 9.4,0.875 9.4,3.6 6.2,6.8 6.2,9.6
GND on Top Layer "GND_L01_P036" (solid, pour order 36): 3,26.725 3,21.675 6.975,21.675 7,21.7 7,25.975 7.25,26.225 9,26.225 9.25,25.975 9.25,24.725 9.25,26.725

## Silkscreen, mask and mechanical layers (free items; w line width, h text height)
Top Overlay:
  lines w0.17: 32.661,0.9 14.675,0.9 14.675,35.9 32.661,35.9
  text "Crafted by brain" at 28.1,37.292 h1 r180
Bottom Overlay:
  drawing of 113 lines, arcs and shapes, not listed
  text "Easy Ride Open Source" at 25.125,35.225 h1.2
  text "www.smartmoto.asia" at 26.725,27.65 h1.5
  text "BR" at 2.525,19.8 h1.2
  text "ST_IN" at 17.525,19.675 h1.2
  text "HR" at 2.525,15.55 h1.2
  text "ST" at 14.075,15.55 h1.2
  text "IGN" at 15.05,11.4 h1.2
  text "BT" at 2.475,11.3 h1.2
  text "+12" at 15.15,7.125 h1.2
  text "G" at 1.9,6.975 h1.2
Board shape:
  the board outline again, w0.17